# Altium PCB nanopiair_audiohat.PcbDoc
Units mm, origin at the board's own origin, x right, y up, seen from the top; angles counter-clockwise.
Board outline 40.01 x 40.01 mm, 4 copper layers (Top Layer, GND, POWER, Bottom Layer), stack 0.778 mm thick; 73 components, 57 nets, 277 pads, 226 vias.
Unrouted connection lines stored in the file: 1.
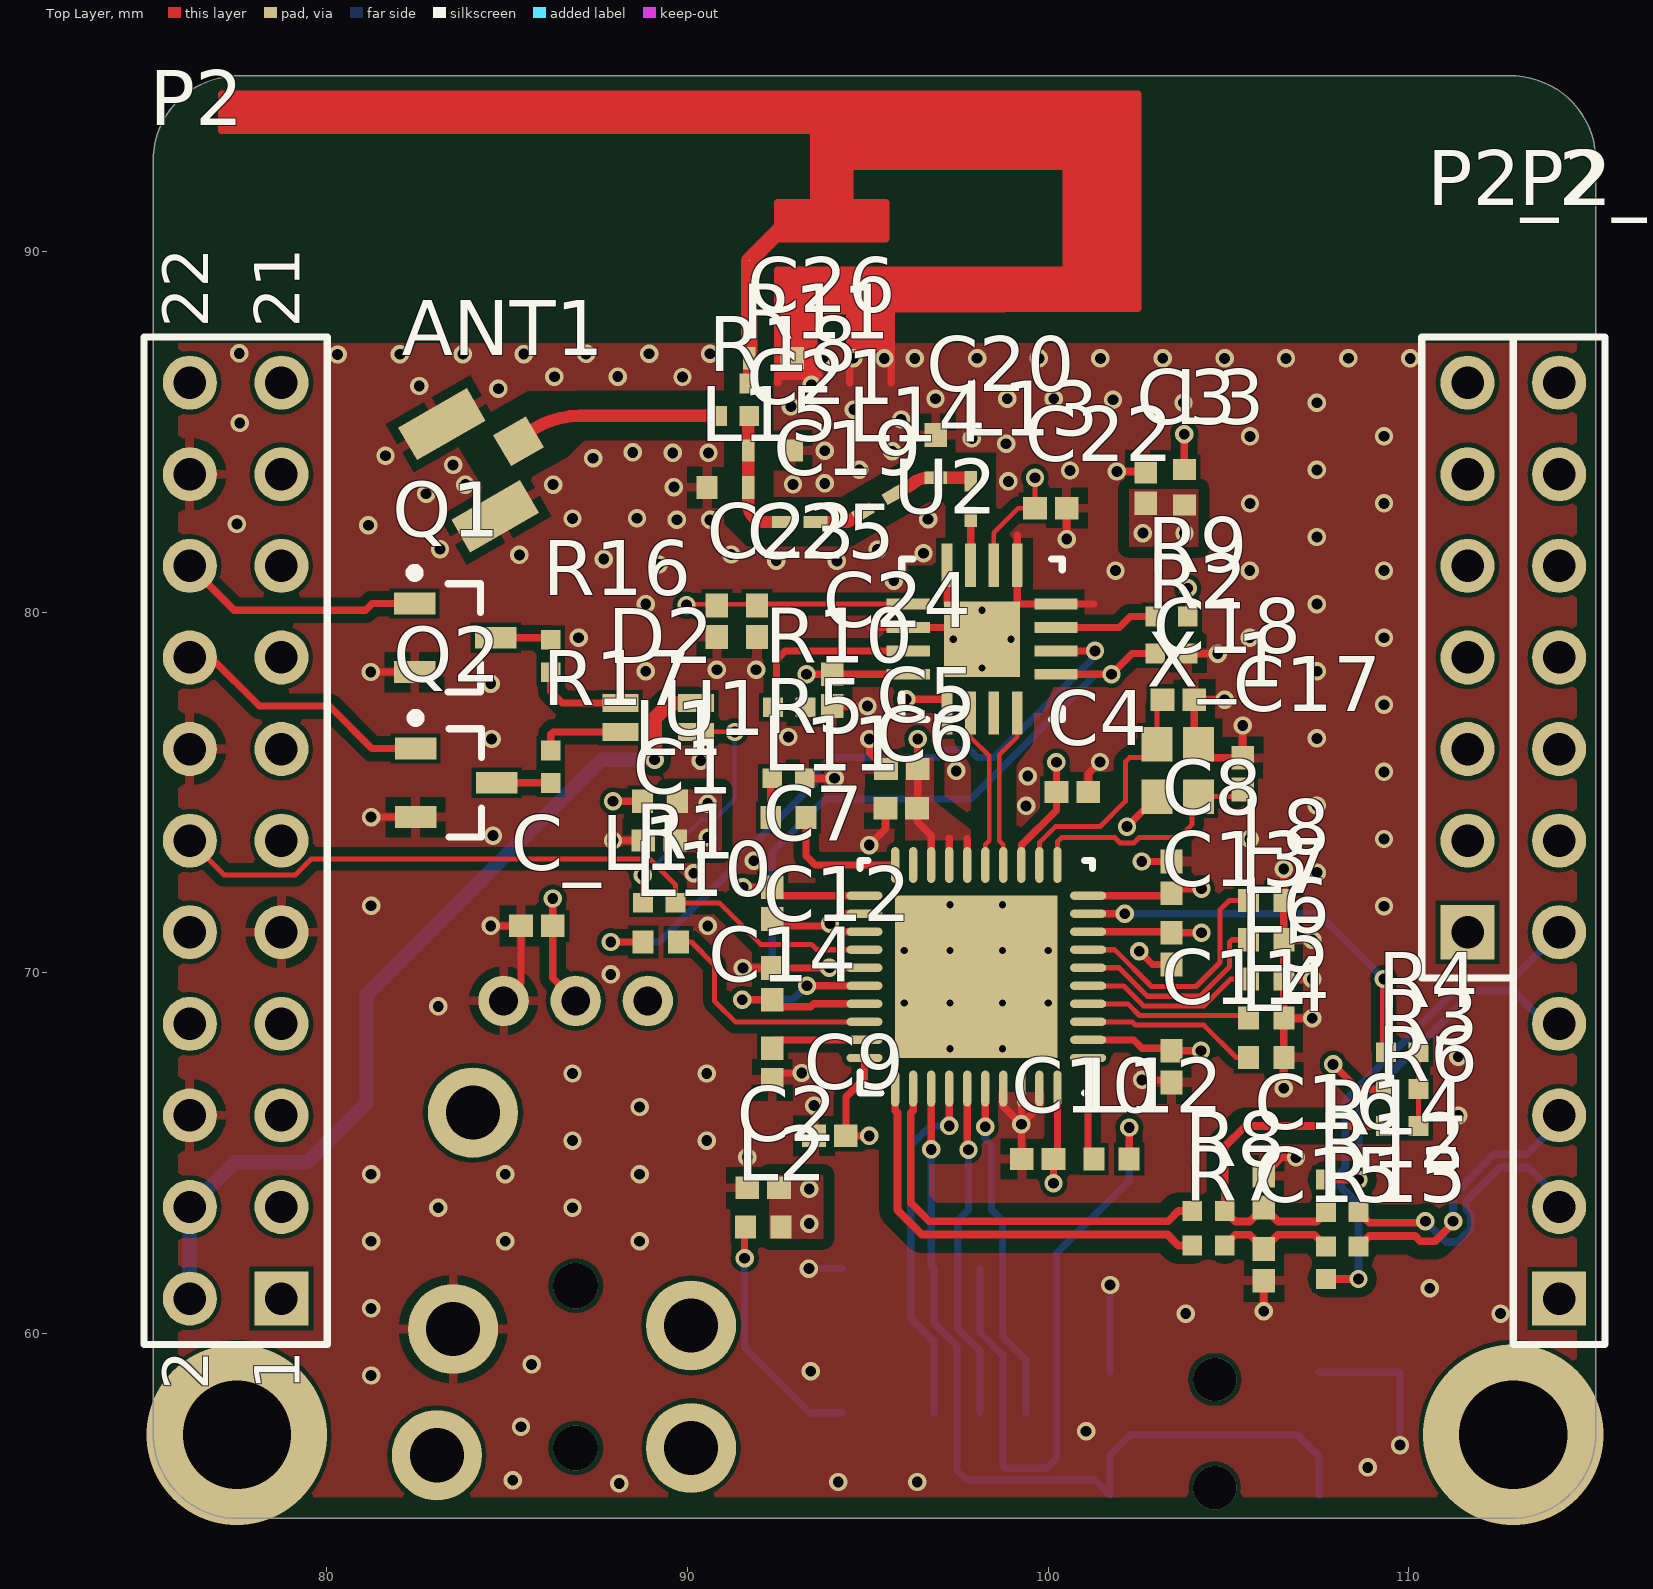
[diagram p0: Top Layer view]
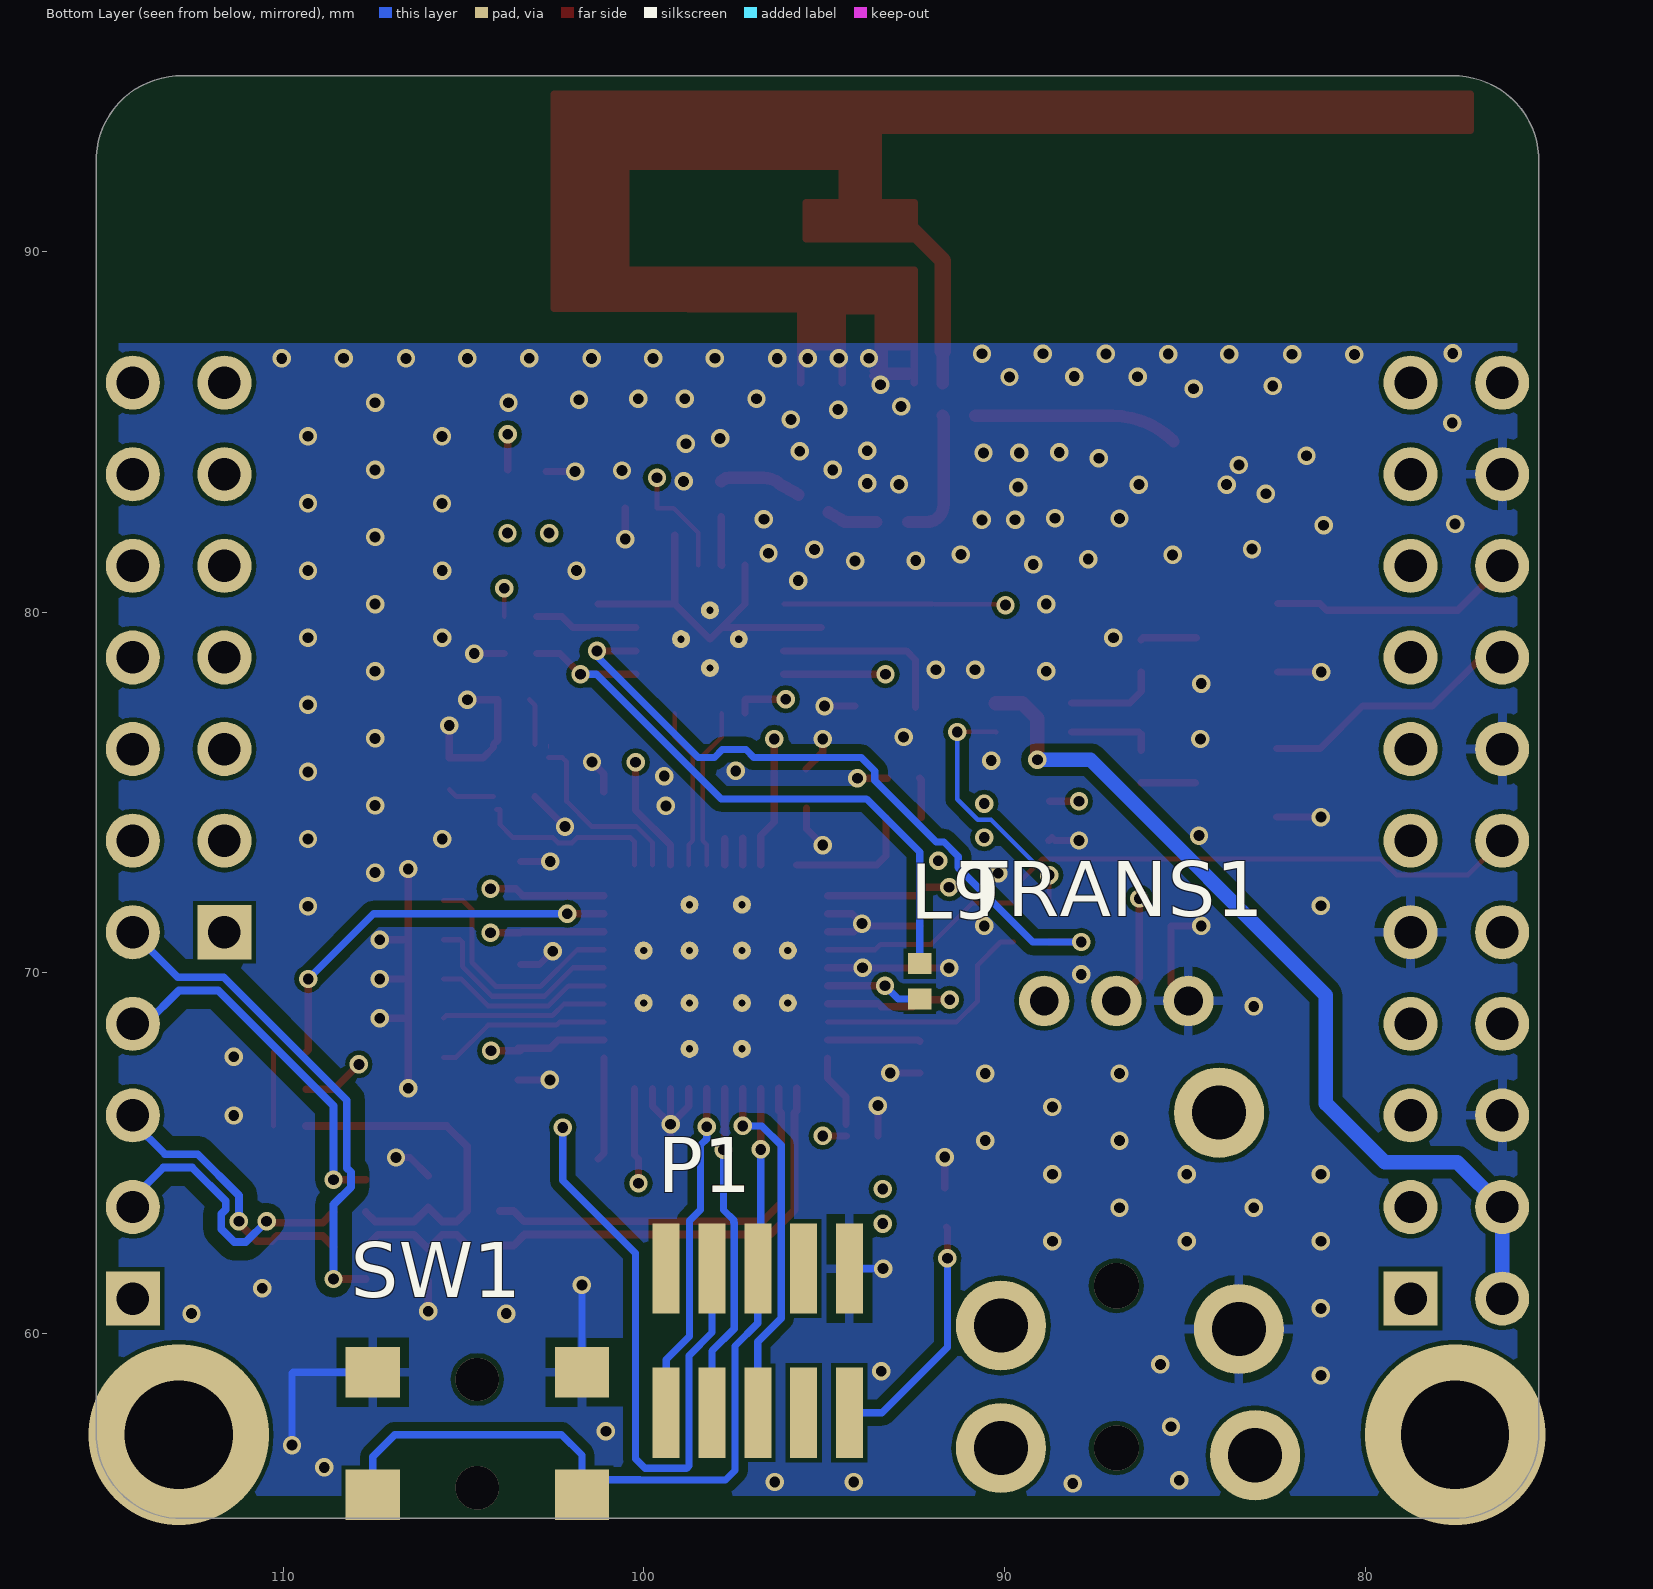
[diagram p1: Bottom Layer view, seen from below]
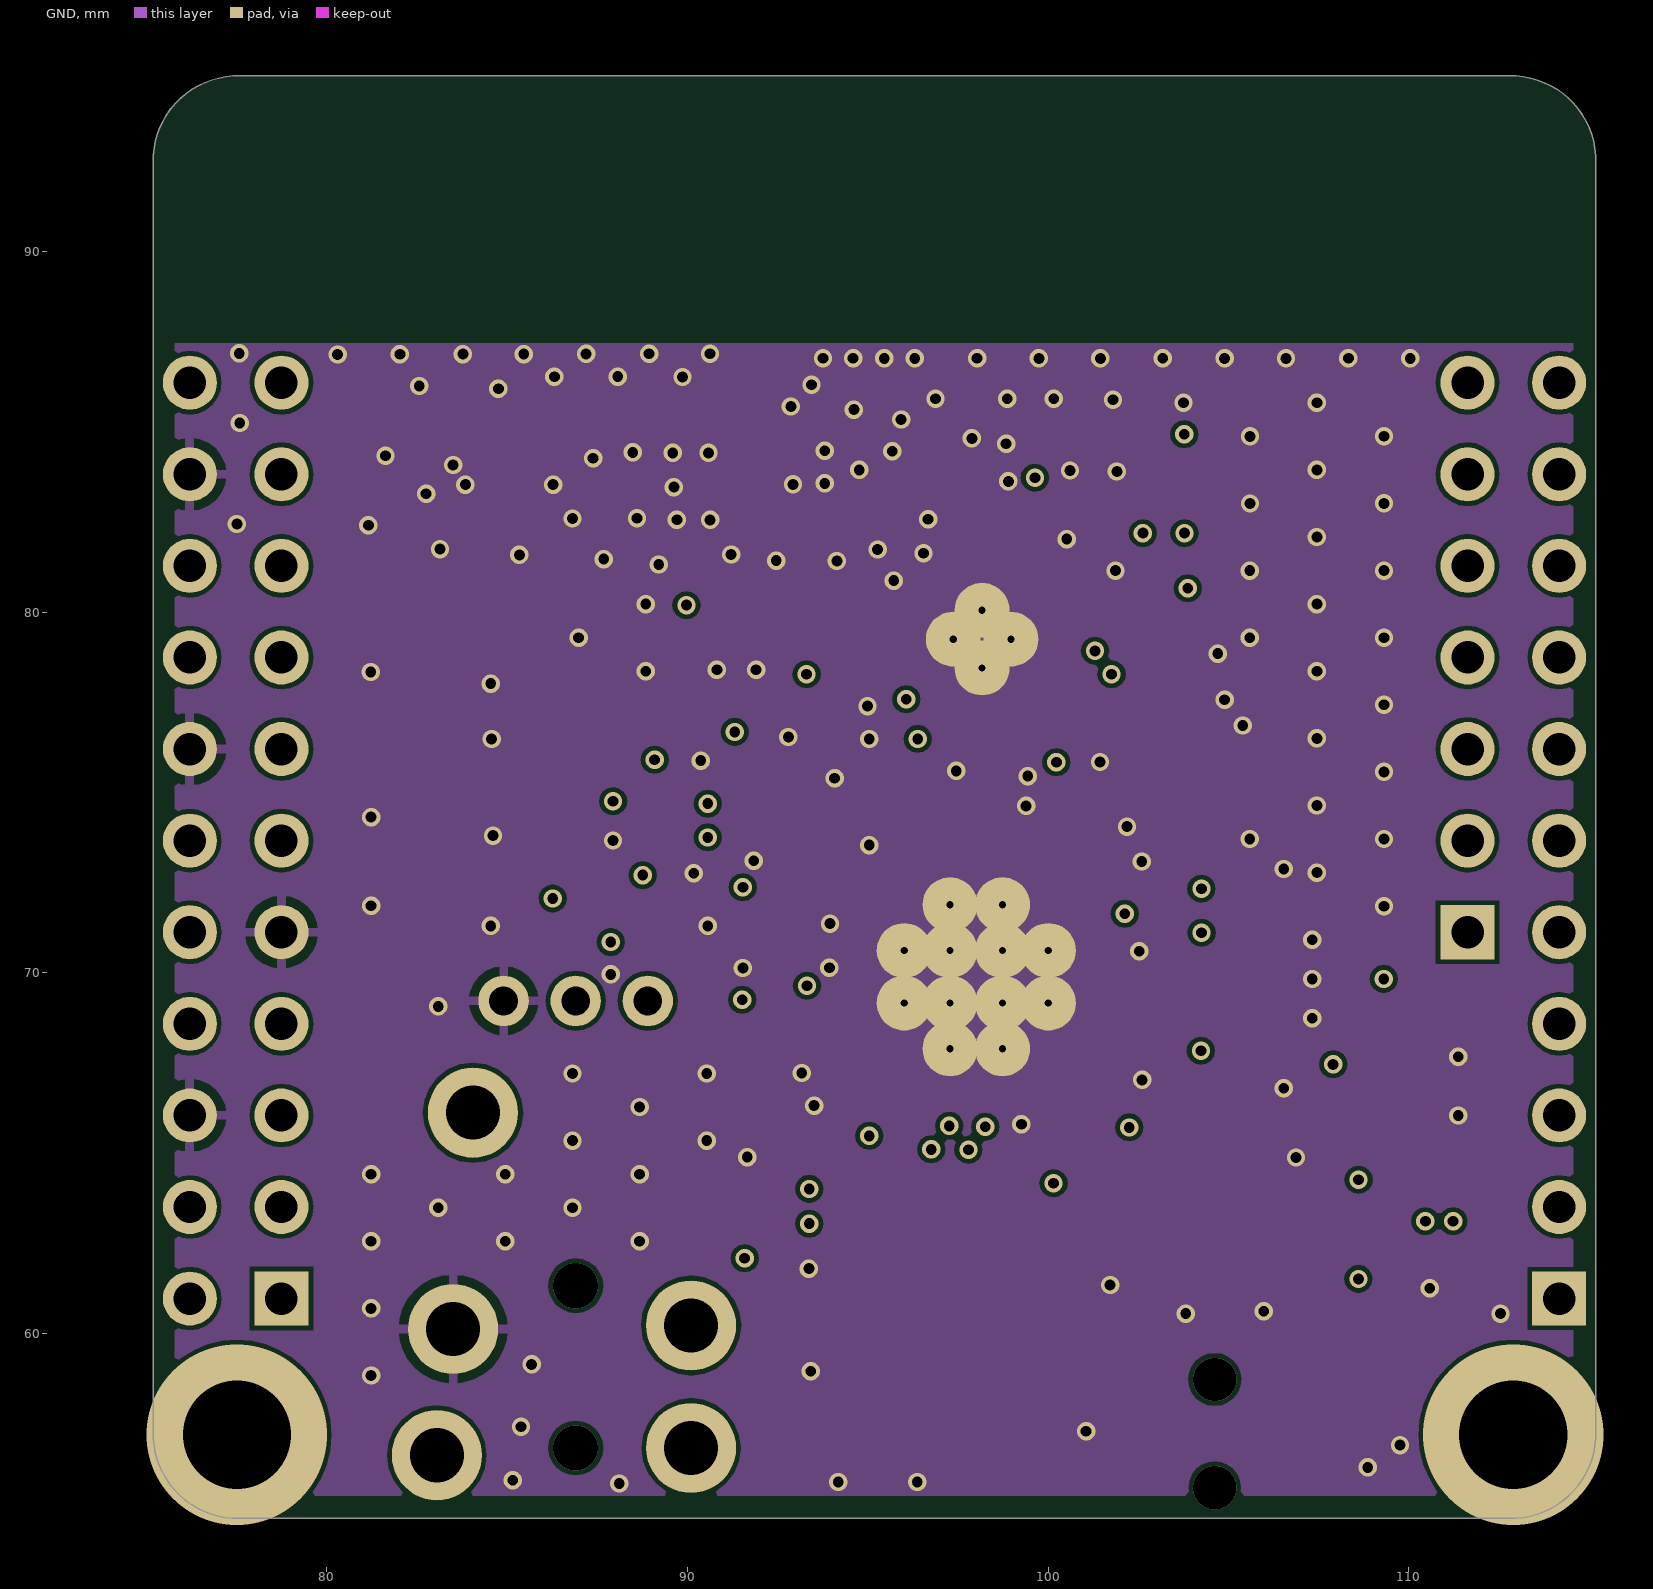
[diagram p2: GND]
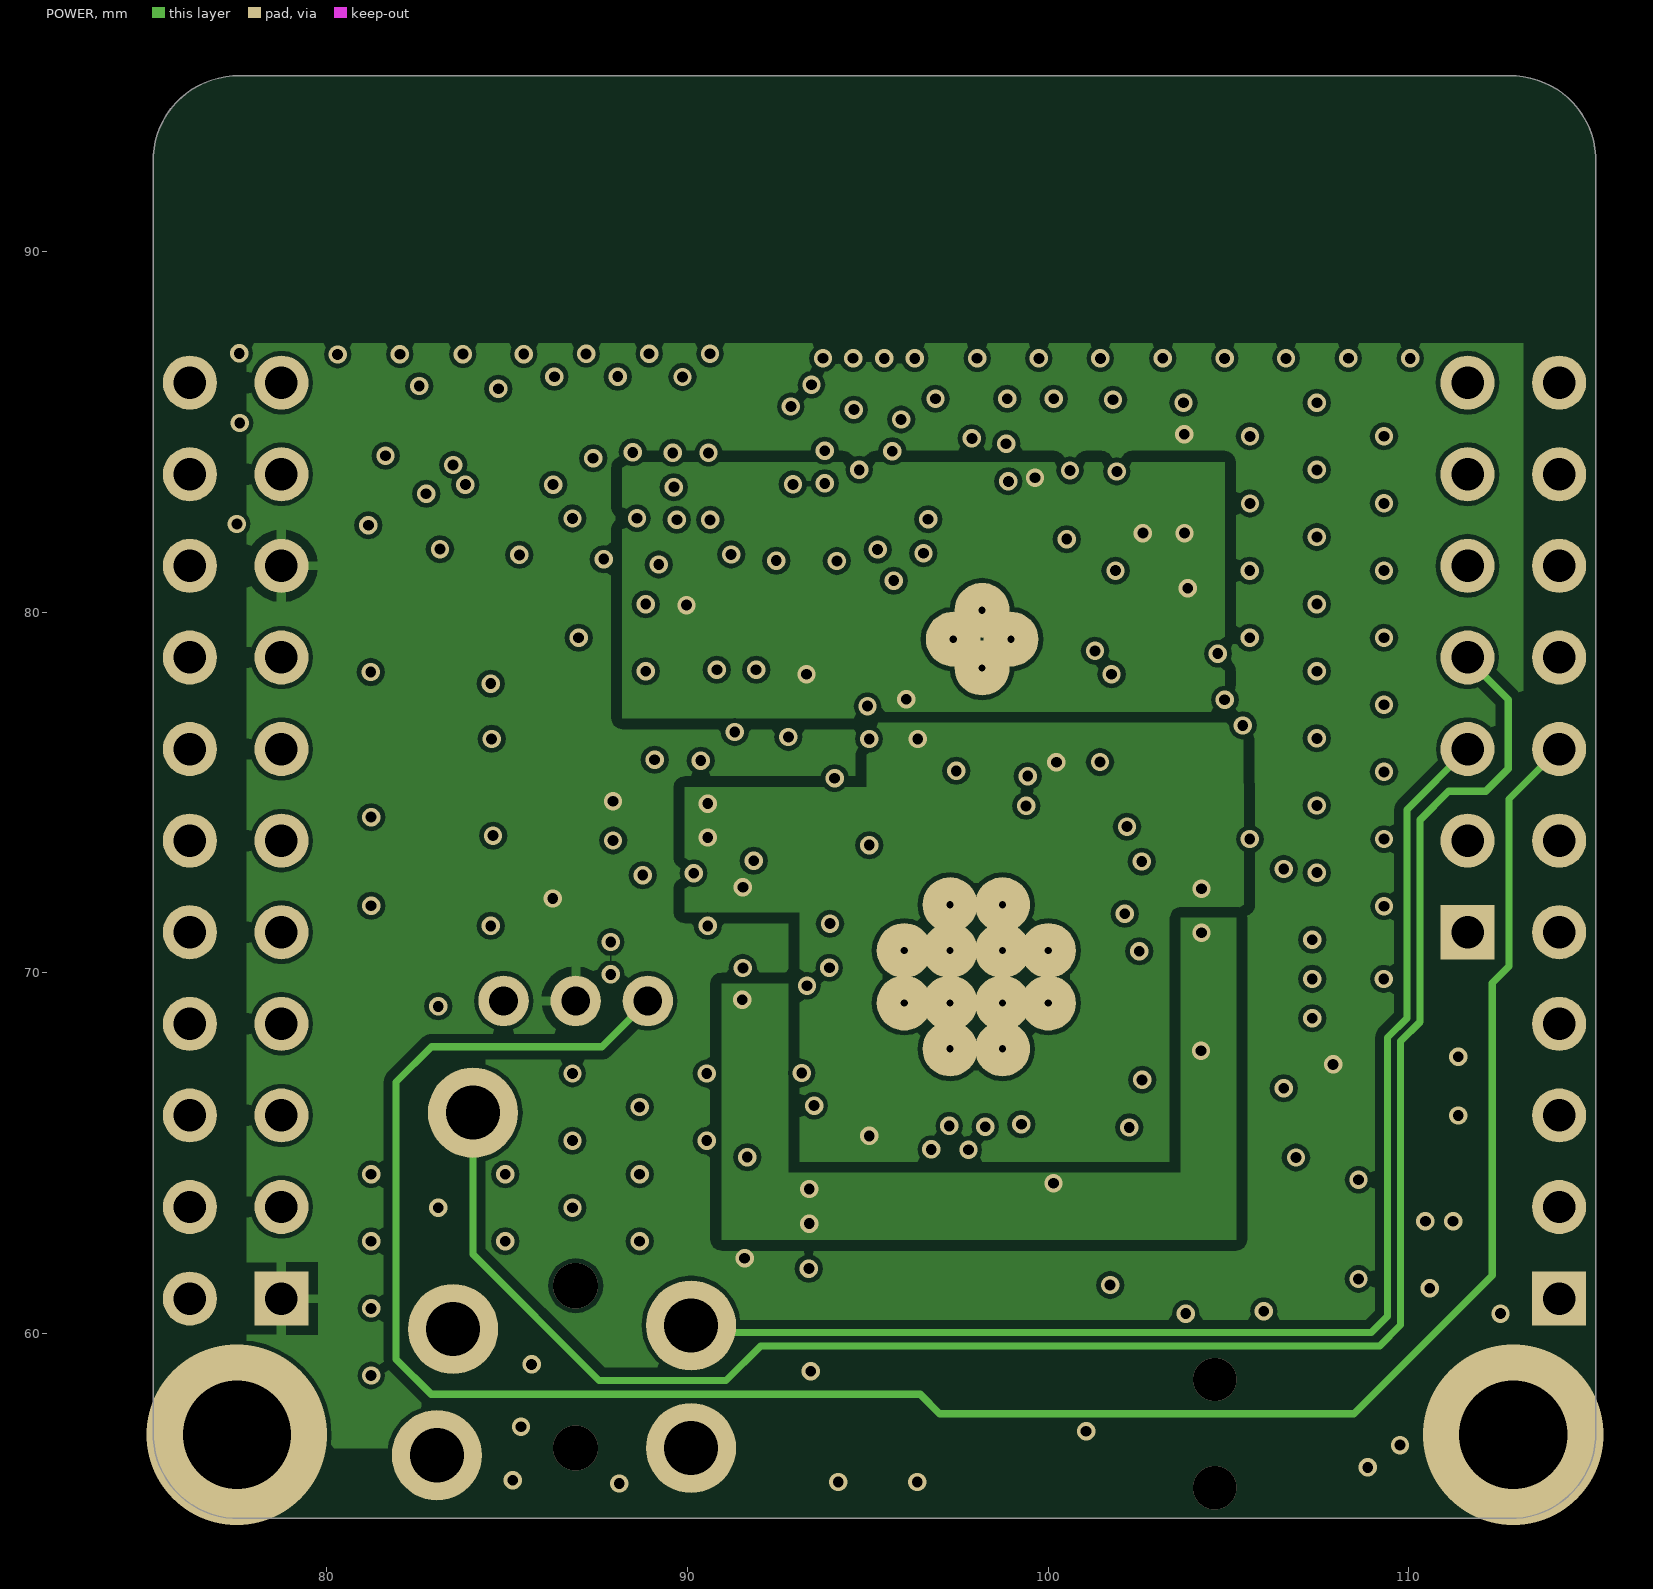
[diagram p3: POWER]
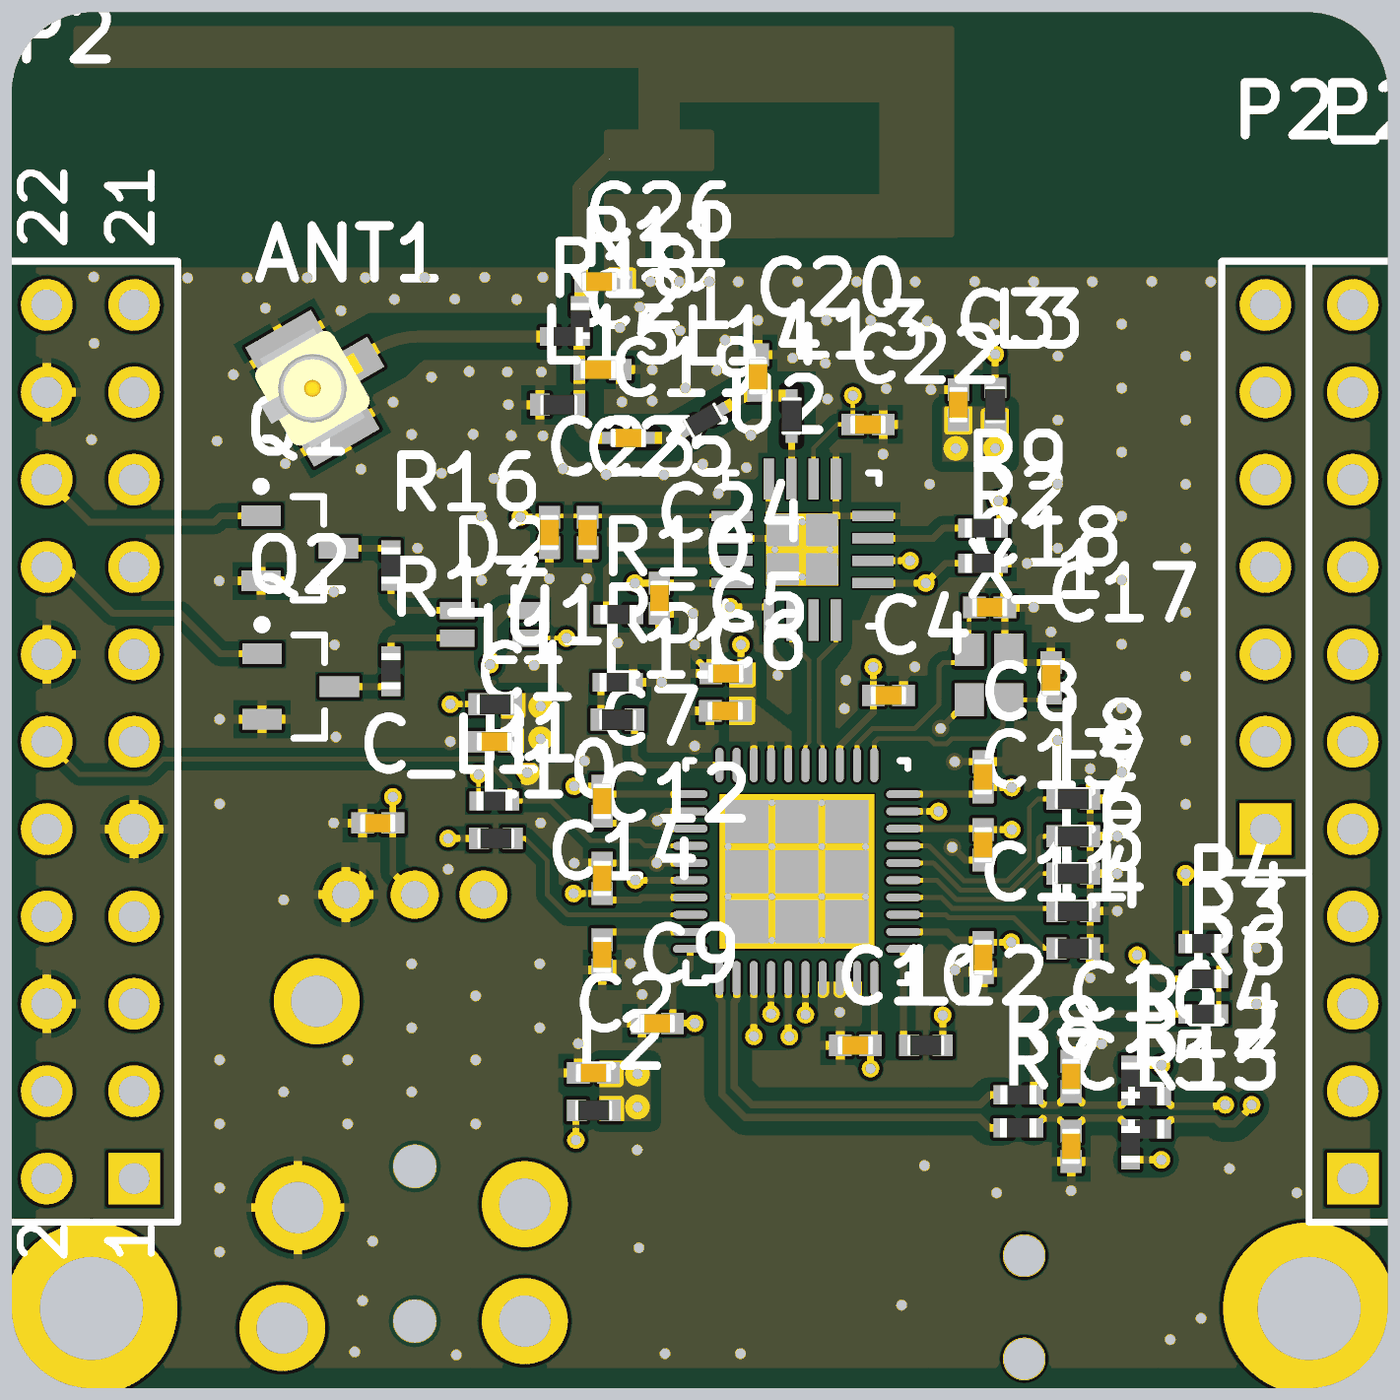
[diagram p4: 3D render of the assembled board from above, using the file's embedded part models]

## Layer stack, top to bottom
Top Solder: solder mask 0.0102, Solder Resist, Dk 3.5
Top Layer: signal copper 0.0356
Dielectric 1: core 0.254, FR-4, Dk 4.2
GND: signal copper 0.036
Dielectric 3: prepreg 0.127, Dk 4.2
POWER: signal copper 0.036
Dielectric 2: core 0.254, Dk 4.2
Bottom Layer: signal copper 0.0356
Bottom Solder: solder mask 0.0102, Solder Resist, Dk 3.5

## Board outline
75.184,57.277 ccw(c77.534,57.213) 77.594,54.864 112.776,54.864 ccw(c112.84,57.213) 115.189,57.274 115.189,92.456 ccw(c112.84,92.519) 112.779,94.869 77.597,94.869 ccw(c77.534,92.519) 75.184,92.459

## Design rules (kind name [scope] priority, off if disabled: settings)
Clearance Clearance_1 [(InDifferentialPairClass('All Differential Pairs'))] p1: gap=0.127 ignorepadtopadclearanceinfootprint=FALSE except(0: Arc-Hole Track-Hole SMDPad-Hole THPad-Hole Via-Hole Fill-Hole Poly-Hole Region-Hole Text-Hole; 0.3: Poly-Poly; 0.4: Arc-Track Arc-Poly Track-Poly)
Clearance [All] p2: gap=0.127 ignorepadtopadclearanceinfootprint=FALSE except(0: Arc-Hole Track-Hole SMDPad-Hole THPad-Hole Via-Hole Fill-Hole Poly-Hole Region-Hole Text-Hole; 0.254: Track-Poly; 0.3: Poly-Poly)
DiffPairsRouting [InDifferentialPair('RF')] p1: maxlimit=0.254 minlimit=0.127 mostfreqgap=0.152 toplayer_minwidth=0.127 toplayer_maxwidth=0.381 toplayer_prefwidth=0.127 midlayer1_minwidth=0.127 midlayer1_maxwidth=0.381 midlayer1_prefwidth=0.127 midlayer2_minwidth=0.127 midlayer2_maxwidth=0.381 midlayer2_prefwidth=0.127 bottomlayer_minwidth=0.127 bottomlayer_maxwidth=0.381 bottomlayer_prefwidth=0.127 maxuncoupledlength=12.7
DiffPairsRouting USBDiff [All] p2: maxlimit=0.152 minlimit=0.152 mostfreqgap=0.152 toplayer_minwidth=0.216 toplayer_maxwidth=0.216 toplayer_prefwidth=0.216 midlayer1_minwidth=0.216 midlayer1_maxwidth=0.216 midlayer1_prefwidth=0.216 midlayer2_minwidth=0.216 midlayer2_maxwidth=0.216 midlayer2_prefwidth=0.216 bottomlayer_minwidth=0.216 bottomlayer_maxwidth=0.216 bottomlayer_prefwidth=0.216 maxuncoupledlength=12.7
MinimumSolderMaskSliver [All] p1 off: minsoldermaskwidth=0.254
PolygonConnect PolygonConnect_17 [All vs IsVia OR InComponent('U1') OR InComponent('U2')] p1: connectstyle=Direct reliefconductorwidth=0.254 reliefentries=2 polygonreliefangle="90 Angle" airgapwidth=0.254
PolygonConnect PolygonConnect_6 [All vs IsNamedPolygon('VDD')] p2: connectstyle=Direct reliefconductorwidth=0.254 reliefentries=4 polygonreliefangle="90 Angle" airgapwidth=0.254
PolygonConnect PolygonConnect_5 [All vs IsNamedPolygon('VDD_CC2590')] p3: connectstyle=Direct reliefconductorwidth=0.254 reliefentries=4 polygonreliefangle="90 Angle" airgapwidth=0.254
PolygonConnect [All] p4: connectstyle=Relief reliefconductorwidth=0.254 reliefentries=4 polygonreliefangle="90 Angle" airgapwidth=0.254
RoutingVias [All] p1: holewidth=0.3 width=0.51 viastyle="Through Hole" minholewidth=0.254 minwidth=0.457 maxholewidth=0.711 maxwidth=0.914
SilkToSilkClearance [All] p1 off: silktosilkclearance=0.254
SilkToSolderMaskClearance [IsPad] p1 off: minsilkscreentomaskgap=0.254 clearancetoexposedcopper=TRUE
SolderMaskExpansion [All] p1: expansion=0.102
Width [All] p1: maxlimit=5 minlimit=0.127 preferedwidth=0.2
26 further rules are at their usual default settings.

## Classes and differential pairs
differential pair USB3: +USB3_P -USB3_N
differential pair USB2: +USB2_P -USB2_N
differential pair USBPI: +USBPI_P -USBPI_N
differential pair USB: +USB_P -USB_N
differential pair RF: +RF_P -RF_N

## Components (designator, comment, footprint, x,y, rotation, side; value= is the part's Value field where it differs from the comment)
ANT1 "UFL ANT" UFL_ANT 84.833,83.766 r120 top
C1 "" C_0402 89.216,73.664 r0 top value=2.2uF
C2 "" C_0402 92.096,64.032 r0 top value=2.2uF
C3 "" C_0402 102.707,83.458 r270 top value=2.2uF
C4 "" C_0402 100.672,75.008 r180 top value=100nF
C5 "" C_0402 95.944,75.648 r0 top value=100nF
C6 "" C_0402 95.928,74.56 r0 top value=220pF
C7 "" C_0402 92.352,71.928 r90 top value=100nF
C8 "" C_0402 103.424,72.64 r270 top value=100nF
C9 "" C_0402 93.952,65.472 r0 top value=1uF
C10 "" C_0402 99.712,64.832 r180 top value=100nF
C11 "" C_0402 103.424,67.392 r90 top value=100nF
C12 "" C_0402 92.352,69.688 r270 top value=100nF
C13 "" C_0402 103.424,70.664 r90 top value=100nF
C14 "" C_0402 92.352,67.464 r90 top value=1uF
C15 "" C_0402 105.984,61.896 r90 top value=47pF
C16 "" C_0402 105.984,63.928 r270 top value=47pF
C17 "" C_0402 105.398,75.52 r270 top value=12pF
C18 "" C_0402 103.616,77.568 r180 top value=12pF
C19 "" C_0402_RF_IN 93.112,82.496 r0 top value=20pF
C20 "" C_0402_RF_IN_OUT 96.882,84.032 r270 top value=1.6pF
C21 "" C_0402_RF_IN_OUT 91.997,84.48 r180 top value=1.3pF
C22 "" C_0402 100.077,82.883 r180 top value=1nF
C23 "" C_0402 90.816,79.744 r90 top value=1nF
C24 "" C_0402 94.016,77.832 r90 top value=1nF
C25 "" C_0402 91.927,79.744 r90 top value=18pF
C26 "" C_0402_RF_IN_OUT 92.026,87.04 r180 top value=1.3pF
C_L1 "" C_0402 85.824,71.296 r0 top value=0.1uF
D2 "RGB" RGB 89.088,77.824 r180 top
L1 "Inductor" L_0402 89.238,74.752 r0 top value="EMI HF block"
L2 "Inductor" L_0402 92.103,62.944 r0 top value="EMI HF block"
L3 "Inductor" L_0402 103.779,83.458 r270 top value="EMI HF block"
L4 "Inductor" L_0402 106.048,67.648 r0 top value=6.8nF
L5 "Inductor" L_0402 106.048,68.736 r0 top value=6.8nF
L6 "Inductor" L_0402 106.048,69.824 r0 top value=6.8nF
L7 "Inductor" L_0402 106.048,70.912 r0 top value=6.8nF
L8 "Inductor" L_0402 106.048,72 r0 top value=6.8nF
L9 "Inductor" L_0402 92.352,69.76 r90 bottom value=6.8nF
L10 "Inductor" L_0402 89.258,70.848 r180 top value=6.8nF
L11 "Inductor" L_0402 92.8,74.304 r180 top value=6.8nF
L12 "Inductor" L_0402 101.76,64.832 r180 top value=6.8nF
L13 "Inductor" L_0402_RF_IN 97.857,83.136 r90 top value="2.2nH RF"
L14 "Inductor" L_0402_RF_IN 95.296,83.011 r30 top value="3.9nH RF"
L15 "Inductor" L_0402_RF_IN_OUT 91.2,83.456 r180 top value="1.5nH DNM"
P1 "debug" "2x5 1.27mm header" 96.842,59.792 r0 bottom
P2 "Header 11X2" HDR2X11 78.74,60.96 r90 top locked
P2_1 "Header 11" HDR1X11 114.173,60.96 r90 top locked
P2_2 "Header 7" HDR1X7 111.633,71.12 r90 top locked
Q1 "QNPN" SOT-23B_N 83.557,79.286 r0 top
Q2 "QNPN" SOT-23B_N 83.584,75.264 r0 top
R1 "Res1" R_0402 89.218,71.936 r180 top
R2 "Res1" R_0402 103.424,78.848 r180 top value=10k
R3 "Res1" R_0402 109.824,66.768 r180 top value=NM
R4 "Res1" R_0402 109.824,67.792 r0 top value=0
R5 "Res1" R_0402 92.802,75.392 r180 top value=56k
R6 "Res1" R_0402 109.824,65.744 r0 top value="10k (ev mindre)"
R7 "Res1" R_0402 104.448,62.432 r0 top value=33
R8 "Res1" R_0402 104.45,63.392 r0 top value=33
R9 "Res1" R_0402 103.424,79.872 r0 top value=4.3k
R10 "Res1" R_0402 92.822,77.361 r180 top value=4.3k
R11 "Res1" R_0402 91.715,85.89 r90 top value=33
R12 "Res1" R_0402 108.162,63.36 r180 top value=0
R13 "Res1" R_0402 108.162,62.4 r180 top value=0
R14 "Res1" R_0402 107.712,63.808 r270 top value=0
R15 "Res1" R_0402 107.712,61.954 r90 top value=0
R16 "Res1" R_0402 86.208,78.782 r90 top value=330
R17 "Res1" R_0402 86.208,75.712 r270 top value=330
R18 "Res1" R_0402 91.265,85.44 r0 top value=33
SW1 "edge switch" "edge swich" 104.621,57.216 r270 bottom
TRANS1 "newComboJack" "audio combojack" 86.825,58.94 r0 bottom locked
U1 "CC8531RHAR" RHA0040H 98.009,69.885 r90 top value=Value
U2 "CC2590RGVR" RGV0016A 98.17,79.248 r90 top value=Value
X_1 "X_48" "48Mhz 2x1.6mm SMD" 104.679,74.372 r90 top

## Footprints (in the part's own frame and the unit in brackets; to place one, negate y for a bottom-side part, rotate by r counter-clockwise, add the part's x,y. Pads: shape width x height; smd on the part's side, far side on the other; paste and mask are expansions set on the pad)
"2x5 1.27mm header" [mm]
  rect 0.75x2.5 smd: 1(-2.54,-2) 2(-2.54,2) 3(-1.27,-2) 4(-1.27,2) 5(0,-2) 6(0,2) 7(1.27,-2) 8(1.27,2) 9(2.54,-2) 10(2.54,2)
"48Mhz 2x1.6mm SMD" [mm]
  rect 0.95x0.85 smd: 1(0.508,0.508) 2(1.958,0.508) 3(1.958,1.658) 4(0.508,1.658)
  body extent 0.1,0.15 2.35,1.97, height 0.5
"audio combojack" [mm] "FCR684204T"
  round 2.5 hole 1.5: 1(3.275,2.125) 2(-2.775,-7.175) 3(3.275,-1.275) 4(-3.325,-1.175) 5(-3.775,2.325)
  round 1.4 hole 0.8: GND(-1.925,-10.275) SIG(2.075,-10.275) VCC(0.075,-10.275)
  body extent -4.85,-11.88 4.45,6.15, height 4.7
C_0402 [mm] "Chip Capacitor, 2-Leads, Body 1,00x0,50mm, IPC Medium Density"
  rect 0.66x0.62 smd: 1(-0.44,0) 2(0.44,0)
  body extent -0.53,-0.28 0.53,0.28, height 0.55
C_0402_RF_IN [mm] "Chip Capacitor, 2-Leads, Body 1,00x0,50mm, IPC Medium Density"
  rect 0.66x0.343 smd mask+0.202: 1(-0.44,0) 2(0.44,0)
  body extent -0.53,-0.28 0.53,0.28, height 0.55
C_0402_RF_IN_OUT [mm] "Chip Capacitor, 2-Leads, Body 1,00x0,50mm, IPC Medium Density"
  rect 0.343x0.62 smd: 1(0.31,0)
  rect 0.66x0.62 smd: 2(-0.88,0)
  body extent -0.76,-0.27 0.29,0.28, height 0.55
"edge swich" [mm]
  rect 1.4x1.5 smd: A(-1.7,-2.9) A(-1.7,2.9) B(1.7,-2.9) B(1.7,2.9)
  body extent -3.03,-2.02 4.37,1.96, height 1.5
HDR1X7 [mm] "Connector; Header; 7 Position"
  rect 1.5x1.5 hole 0.9: 1(0,0)
  round 1.5 hole 0.9: 2(2.54,0) 3(5.08,0) 4(7.62,0) 5(10.16,0) 6(12.7,0) 7(15.24,0)
  silkscreen extent -1.27,-1.27 16.51,1.27
HDR1X11 [mm] "Connector; Header; 11 Position"
  rect 1.5x1.5 hole 0.9: 1(0,0)
  round 1.5 hole 0.9: 2(2.54,0) 3(5.08,0) 4(7.62,0) 5(10.16,0) 6(12.7,0) 7(15.24,0) 8(17.78,0) 9(20.32,0) 10(22.86,0) 11(25.4,0)
  silkscreen extent -1.27,-1.27 26.67,1.27
HDR2X11 [mm] "Connector; Header; 11x2 Position"
  rect 1.5x1.5 hole 0.9: 1(0,0)
  round 1.5 hole 0.9: 2(0,2.54) 3(2.54,0) 4(2.54,2.54) 5(5.08,0) 6(5.08,2.54) 7(7.62,0) 8(7.62,2.54) 9(10.16,0) 10(10.16,2.54) 11(12.7,0) 12(12.7,2.54) 13(15.24,0) 14(15.24,2.54) 15(17.78,0) 16(17.78,2.54) 17(20.32,0) 18(20.32,2.54) 19(22.86,0) 20(22.86,2.54) 21(25.4,0) 22(25.4,2.54)
  silkscreen extent -1.27,-1.27 26.67,3.81
L_0402 [mm] "Inductor 0402"
  rect 0.58x0.64 smd: 1(-0.49,0) 2(0.49,0)
  body extent -0.55,-0.3 0.55,0.3, height 0.6
L_0402_RF_IN [mm] "Inductor 0402"
  rect 0.58x0.343 smd mask+0.202: 1(-0.49,0) 2(0.49,0)
  body extent -0.55,-0.3 0.55,0.3, height 0.6
L_0402_RF_IN_OUT [mm] "Inductor 0402"
  rect 0.343x0.64 smd: 1(-0.49,0)
  rect 0.58x0.64 smd: 2(0.66,0)
  body extent -0.44,-0.3 0.66,0.3, height 0.6
R_0402 [mm] "Chip Resistor, 2-Leads, Body 1,00x0,50mm, IPC Medium Density"
  rect 0.55x0.55 smd: 1(-0.45,0) 2(0.45,0)
  body extent -0.53,-0.28 0.53,0.28, height 0.4
RGB [mm]
  rect 1x0.5 smd: 1(-1.15,1.15) 2(0.95,1.15) 3(-1.15,0.35) 4(0.95,0.35)
RGV0016A [mm]
  rect 1.2x0.3 smd paste+0 mask+0.051: 1(-2.05,0.975) 2(-2.05,0.325) 3(-2.05,-0.325) 4(-2.05,-0.975) 9(2.05,-0.975) 10(2.05,-0.325) 11(2.05,0.325) 12(2.05,0.975)
  rect 0.3x1.2 smd paste+0 mask+0.051: 5(-0.975,-2.05) 6(-0.325,-2.05) 7(0.325,-2.05) 8(0.975,-2.05) 13(0.975,2.05) 14(0.325,2.05) 15(-0.325,2.05) 16(-0.975,2.05)
  rect 2.1x2.1 smd paste-1.037 mask+0.051: 17(0,0)
  round 0.5 / inner round 1.524 / far side round 0.5 hole 0.203 mask+0.051: V(-0.8,0) V(0,0.8) V(0,-0.8) V(0.8,0)
  silkscreen extent -2.22,-2.22 2.22,2.22, body extent -2.12,-2.12 2.12,2.12, height 1
RHA0040H [mm]
  oval 1x0.23 smd paste+0 mask+0.076: 1(-3.1,2.25) 2(-3.1,1.75) 3(-3.1,1.25) 4(-3.1,0.75) 5(-3.1,0.25) 6(-3.1,-0.25) 7(-3.1,-0.75) 8(-3.1,-1.25) 9(-3.1,-1.75) 10(-3.1,-2.25) 21(3.1,-2.25) 22(3.1,-1.75) 23(3.1,-1.25) 24(3.1,-0.75) 25(3.1,-0.25) 26(3.1,0.25) 27(3.1,0.75) 28(3.1,1.25) 29(3.1,1.75) 30(3.1,2.25)
  oval 0.23x1 smd paste+0 mask+0.076: 11(-2.25,-3.1) 12(-1.75,-3.1) 13(-1.25,-3.1) 14(-0.75,-3.1) 15(-0.25,-3.1) 16(0.25,-3.1) 17(0.75,-3.1) 18(1.25,-3.1) 19(1.75,-3.1) 20(2.25,-3.1) 31(2.25,3.1) 32(1.75,3.1) 33(1.25,3.1) 34(0.75,3.1) 35(0.25,3.1) 36(-0.25,3.1) 37(-0.75,3.1) 38(-1.25,3.1) 39(-1.75,3.1) 40(-2.25,3.1)
  rect 4.5x4.5 smd paste-2.237 mask+0.051: 41(0,0)
  round 0.5 / inner round 1.524 / far side round 0.5 hole 0.203 mask+0.051: V(-2,-0.727) V(-2,0.727) V(-0.727,2) V(-0.727,-0.727) V(-0.727,0.727) V(-0.727,-2) V(0.727,2) V(0.727,-0.727) V(0.727,0.727) V(0.727,-2) V(2,-0.727) V(2,0.727)
  silkscreen extent -3.22,-3.22 3.22,3.22, body extent -3.13,-3.13 3.13,3.13, height 1
SOT-23B_N [mm] "SOT23, 3-Leads, Body 2.9x1.3mm, Pitch 0.95mm, Lead Span 2.4mm, IPC Medium Density"
  rect 1.15x0.6 smd: 1(-1.125,0.95) 2(-1.125,-0.95) 3(1.125,0)
  silkscreen extent -1.25,-1.5 0.7,1.92, body extent -0.7,-1.5 0.7,1.5, height 1.14
UFL_ANT [mm]
  rect 1.05x2.2 smd: 1(-0.875,0.7) 2(2.075,0.7)
  rect 1x1.05 smd: 3(0.6,-0.9)
  body extent -0.9,-0.85 2.1,2.25, height 1.25

## Part data
C1 C2 C3 C4 C5 C6 C7 C8 C9 C10 C11 C12 C13 C14 C15 C16 C17 C18 C19 C20 C21 C22 C23 C24 C25 C26 C_L1: library part Cap
P2: "Header, 11-Pin, Dual row", LatestRevisionDate=17-Jul-2002, LatestRevisionNote="Re-released for DXP Platform.", Publisher="Altium Limited"
P2_1: "Header, 11-Pin", LatestRevisionDate=17-Jul-2002, LatestRevisionNote="Re-released for DXP Platform.", Publisher="Altium Limited"
P2_2: "Header, 7-Pin", LatestRevisionDate=17-Jul-2002, LatestRevisionNote="Re-released for DXP Platform.", Publisher="Altium Limited"
Q1 Q2: "NPN Bipolar Transistor", LatestRevisionDate=29-May-2009, LatestRevisionNote="IPC-7351 Footprint Added.", PackageDescription="3-Pin SOT-23 Package 0.95 mm Pitch, 2.4 mm Lead Span", PackageReference=SOT-23B, PackageVersion=Aug-1999, Published=8-Jun-2000, Publisher="Altium Limited"
R1 R2 R3 R4 R5 R6 R7 R8 R9 R10 R11 R12 R13 R14 R15 R16 R17 R18: "Resistor"
  R1: =330
U1 U2: "Imported", Manufacturer="Texas Instruments", RefDes=RefDes, TYPE=TYPE
  U1: PartNumber=CC8531RHAR
  U2: PartNumber=CC2590RGVR

## Free pads (board coordinates)
  round 0.025 smd: 1(91.715,87.227)
  round 0.025 smd mask+0.102: 1(91.715,89.748) 1(91.715,89.748) 1(92.569,90.602)

## Via types
v1: diameter 0.51, hole 0.3, Top Layer to Bottom Layer, tented both sides, 173 vias
v2: diameter 0.51, hole 0.3, Top Layer to Bottom Layer, 44 vias
v3: diameter 1.2, hole 1.2, Top Layer to Bottom Layer, 3 vias
v4: diameter 0.51, hole 0.3, Top Layer to Bottom Layer, tented top, 2 vias
v5: diameter 1.25, hole 1.25, Top Layer to Bottom Layer, tented both sides, 2 vias
v6: diameter 5, hole 3, Top Layer to Bottom Layer, 2 vias

## Nets (pads, with @x,y where several pads share a name; then routed paths per layer and width w, separated by ;. In a path a pad name is that pad's centre, name@x,y a point inside that pad or via, vN(x,y) a via of type N, cw(c..) or ccw(c..) an arc to the next point about the centre after c; other vN are vias at no path point)
3V3: C_L1.2 L1.1 L2.1 L3.1 P1.2 P2.1 P2.17 R3.2 TRANS1.VCC | length 13.5
  Top Layer w0.2: v2(86.264,72.056) C_L1.2 86.264,69.851 TRANS1.VCC ; v2(87.936,74.752) L1.1 ; v2(91.584,62.08) 91.584,62.916 L2.1 ; L3.1 v2(103.779,84.928) ; v2(107.904,67.456) 108.592,66.768 R3.2
  Bottom Layer w0.2: v2(91.584,62.08) 91.584,59.608 93.4,57.792 P1.2
5V: D2.3 P2.2 P2.4 | length 24.8
  Top Layer w0.4: v2(89.088,75.904) 89.088,77.056 89.506,77.474 D2.3
  Bottom Layer w0.4: P2.2 P2.4 77.44,64.74 79.46,64.74 81.024,66.304 81.088,66.368 81.088,69.376 87.616,75.904 v2(89.088,75.904)
GND: ANT1.1 ANT1.2 C1.1 C2.1 C3.1 C4.1 C5.1 C6.1 C7.1 C8.1 C9.1 C10.2 C11.1 C12.1 C13.1 C14.1 C15.1 C16.1 C17.1 C18.1 C20.2 C21.2 C22.1 C23.1 C24.1 C25.1 C26.2 C_L1.1 L4.2 L5.2 L6.2 L7.2 L8.2 L15.2 P1.1 P2.6 P2.9 P2.14 P2.20 Q1.2 Q2.2 R2.1 R5.1 R10.1 SW1.A TRANS1.4 TRANS1.GND U1.7 U1.8 U1.9 U1.32 U1.33 U1.35 U1.41 U1.V U2.8 U2.9 U2.12 U2.14 U2.17 U2.V X_1.2 X_1.4 | length 83.5
  Top Layer w0.2: v1(81.216,78.336) Q1.2 ; v1(81.226,74.314) Q2.2 ; v1(84.544,71.296) C_L1.1 85.384,69.699 TRANS1.GND ; v1(87.936,73.664) 88.599,73.664 88.683,73.749 88.772,73.66 C1.1 ; v1(91.536,70.128) C12.1 93.928,70.128 v1(93.935,70.135) U1.35 ; C2.1 v1(91.656,64.884) ; C14.1@92.352,67.216 v1(93.168,67.216) ; C7.1@92.352,71.296 93.888,71.296 v1(93.952,71.36) ; R5.1 v1(94.08,75.392) ; C9.1 v1(93.512,66.312) ; C24.1@94.144,77.392 v1(94.992,77.392) ; U1.33 94.177,71.135 v1(93.952,71.36) ; U1.32 94.226,71.634 v1(93.952,71.36) ; v1(95.04,73.536) 95.488,73.984 C6.1 ; v1(95.04,76.48) 95.04,76.112 C5.1 ; 95.072,79.573 U2.14 U2.17@97.845,79.573 ; U2.12 97.195,80.223 U2.17@97.845,79.573 ; U1.7 98.759,66.297 v1(99.259,65.797) ; 99.145,82.137 U2.9 U2.17@99.145,80.223 ; U1.8 v1(99.259,65.797) ; C10.2 99.259,64.844 v1(99.259,65.797) ; U1.9 99.759,66.296 v1(99.259,65.797) ; v1(100.517,82.021) C22.1 ; C4.1 101.112,75.512 v1(101.44,75.84) ; 101.27,80.223 U2.8 U2.17@99.145,80.223 ; v1(101.908,83.898) C3.1 ; v1(102.189,74.048) X_1.4 ; v1(102.528,70.592) 102.896,70.224 C13.1 ; v1(102.6,73.08) C8.1 ; v1(102.608,67.024) C11.1@103.488,67.024 ; R2.1 v1(104.704,78.848) ; v1(104.896,77.568) C18.1 104.056,76.445 X_1.2 104.171,76.245 104.456,75.96 C17.1 v1(105.398,76.854) ; v1(105.984,60.608) C15.1 ; C16.1 106.488,64.872 v1(106.875,64.872) ; v1(106.538,66.794) L4.2 L5.2 ; v1(106.538,72.874) L8.2 L7.2 ; v1(107.328,68.736) L5.2 ; v1(107.328,69.824) L6.2 ; v1(107.328,70.912) L7.2 ; U2.17@97.845,79.573 U2.17 U2.17@99.145,80.223 ; L5.2 L6.2 ; L6.2 L7.2
  Top Layer w0.203: 92.502,86.354 92.502,89.488 ; 92.502,87.354 93.502,87.354 ; 92.502,87.456 93.502,87.456 ; 92.502,87.659 93.502,87.659 ; 92.641,86.682 93.641,86.682 ; 92.65,86.542 93.65,86.542 ; v1@93.336,86.41 93.336,87.41 ; v1@93.502,86.354 93.502,88.354 ; 94.502,86.354 94.502,88.354 ; 94.502,87.354 95.652,87.354 ; 94.502,87.456 95.652,87.456 ; 94.502,87.659 95.652,87.659 ; 95.652,86.354 95.652,88.395
  Bottom Layer w0.2: v1(93.368,61.792) P1.1 ; SW1.A@101.721,58.916 v1(101.721,61.337) ; SW1.A@107.521,58.916 109.732,58.916 109.76,58.888 v1(109.76,56.896)
  other v1: 88.109,55.833 94.179,55.872 96.371,55.872 85.155,55.921 101.056,57.28 85.382,57.408 81.226,58.826 93.418,58.944 85.677,59.136 103.818,60.544 112.547,60.544 81.226,60.688 81.226,62.549 84.949,62.549 88.671,62.549 83.087,63.48 86.81,63.48 81.226,64.41 84.949,64.41 88.671,64.41 86.81,65.341 90.533,65.341 111.375,66.037 88.671,66.272 86.81,67.202 90.533,67.202 111.375,67.667 83.087,69.064 87.872,69.952 90.56,71.295 109.316,71.843 81.226,71.856 107.455,72.773 91.84,73.1 105.594,73.704 109.316,73.704 84.608,73.801 99.392,74.624 107.455,74.635 99.437,75.451 109.316,75.565 97.454,75.595 90.368,75.881 84.569,76.48 107.455,76.496 92.8,76.534 109.316,77.427 84.544,78.016 88.842,78.357 107.455,78.357 90.816,78.4 91.904,78.4 86.98,79.288 105.594,79.288 109.316,79.288 88.842,80.219 107.455,80.219 95.721,80.872 101.871,81.149 105.594,81.149 109.316,81.149 89.202,81.318 94.145,81.415 92.463,81.425 87.68,81.467 85.338,81.584 91.209,81.597 96.544,81.632 83.136,81.746 95.273,81.733 107.455,82.08 81.152,82.405 77.503,82.442 89.707,82.559 90.628,82.554 96.673,82.571 86.81,82.595 88.599,82.6 105.6,83.011 109.316,83.013 82.752,83.281 89.623,83.463 83.84,83.533 86.273,83.533 92.925,83.54 93.806,83.568 98.9,83.623 100.608,83.924 94.765,83.942 107.455,83.941 83.5,84.078 87.384,84.262 81.627,84.334 89.591,84.413 90.583,84.413 88.482,84.426 95.68,84.457 93.806,84.471 98.837,84.667 97.887,84.816 105.6,84.872 109.316,84.875 77.582,85.243 95.923,85.34 94.616,85.615 92.867,85.699 103.755,85.803 107.455,85.803 101.801,85.888 96.878,85.913 98.87,85.913 100.157,85.913 84.757,86.192 82.559,86.267 93.44,86.302 86.308,86.523 89.862,86.519 88.066,86.528 93.757,87.04 94.592,87.04 95.459,87.035 96.303,87.035 98.033,87.04 99.747,87.035 101.451,87.035 103.182,87.04 104.895,87.035 106.6,87.035 108.33,87.04 110.043,87.035 80.297,87.143 82.025,87.148 83.772,87.153 85.461,87.153 87.189,87.158 77.568,87.172 88.936,87.163 90.625,87.163
  other v2: 90.173,72.757
  other v4: 108.864,56.279 110.587,61.248
IOVDD: C2.2 C10.1 C11.2 C12.2 C13.2 L2.2 U1.10 U1.12 U1.18 U1.37 | length 12.6
  Top Layer w0.2: v2(91.52,69.248) C12.2 92.544,69.056 93.418,69.056 93.496,69.134 U1.37 ; v2(100.152,64.159) C10.1 100.259,64.939 U1.10 ; U1.12 102.377,68.134 102.608,67.904 C11.2@103.488,67.904 ; U1.18 103.393,71.135 C13.2 v2(104.256,71.104) ; C11.2 v2(104.24,67.832)
  other v2: 93.376,63.04 93.376,64
NetANT1_3: ANT1.3 R18.1 | length 5.7
  Top Layer w0.343: ANT1.3 cw(c87.012,83.036) 87.012,85.44 R18.1
NetC14_2: C14.2 U1.39 | length 2.6
  Top Layer w0.2: C14.2@92.352,68.096 92.39,68.134 U1.39
NetC19_1: C19.1 C21.1 L15.1 R11.1 R18.2 | length 3.7
  Top Layer w0.343: R11.1 ccw(c91.783,85.371) 91.686,85.371 C21.1 91.69,84.477 L15.1 91.69,82.986 ccw(c92.202,82.986) 91.84,82.624 ccw(c92.149,82.933) 92.149,82.496 C19.1
NetC19_2: C19.2 L14.1 | length 1.4
  Top Layer w0.343: C19.2 94.373,82.496 ccw(c94.373,82.715) 94.528,82.56 L14.1
NetC20_1: C20.1 L13.2 L14.2 | length 2.3
  Top Layer w0.343: L14.2 96.192,83.522 cw(c96.674,83.04) 96.674,83.722 C20.1 97.625,83.722 cw(c97.625,83.394) L13.2
NetC26_1: C26.1 R11.2 | length 348.7
  Top Layer w0.203: 77.085,93.552 102.485,93.552 ; 77.085,93.755 102.485,93.755 ; 77.085,93.958 102.485,93.958 ; 77.085,94.161 102.485,94.161 ; 92.502,87.862 93.502,87.862 ; 92.502,88.065 93.502,88.065 ; 92.502,88.268 93.502,88.268 ; 92.502,88.472 102.485,88.472 ; 92.502,88.675 102.485,88.675 ; 92.502,88.878 102.485,88.878 ; 92.502,89.081 102.485,89.081 ; 92.502,89.284 102.485,89.284 ; 92.502,90.504 95.502,90.504 ; 92.502,90.707 95.502,90.707 ; 92.502,90.91 95.502,90.91 ; 92.502,91.113 95.502,91.113 ; 92.502,91.316 95.502,91.316 ; 93.502,88.354 94.502,88.354 ; 93.502,91.52 94.502,91.52 ; 93.502,91.723 94.502,91.723 ; 93.502,91.926 94.502,91.926 ; 93.502,92.129 94.502,92.129 ; 93.502,92.332 94.502,92.332 ; 93.502,92.536 102.485,92.536 ; 93.502,92.739 102.485,92.739 ; 93.502,92.942 102.485,92.942 ; 93.502,93.145 102.485,93.145 ; 93.502,93.348 102.485,93.348 ; 94.502,87.862 95.652,87.862 ; 94.502,88.065 95.652,88.065 ; 94.502,88.268 95.652,88.268 ; 95.652,88.395 101.951,88.421 102.485,88.421 102.485,94.364 77.085,94.364 77.085,93.354 93.502,93.354 93.502,91.354 92.502,91.354 92.502,90.354 95.502,90.354 95.502,91.354 94.502,91.354 94.502,92.354 100.502,92.354 100.502,89.488 92.502,89.488 102.485,89.488 ; 100.502,89.691 102.485,89.691 ; 100.502,89.894 102.485,89.894 ; 100.502,90.097 102.485,90.097 ; 100.502,90.3 102.485,90.3 ; 100.502,90.504 102.485,90.504 ; 100.502,90.707 102.485,90.707 ; 100.502,90.91 102.485,90.91 ; 100.502,91.113 102.485,91.113 ; 100.502,91.316 102.485,91.316 ; 100.502,91.52 102.485,91.52 ; 100.502,91.723 102.485,91.723 ; 100.502,91.926 102.485,91.926 ; 100.502,92.129 102.485,92.129 ; 100.502,92.332 102.485,92.332
  Top Layer w0.343: R11.2 C26.1@91.715,87.227
  Top Layer w0.457: C26.1@91.715,87.227 91.715,89.748 92.569,90.602
NetD2_1: D2.1 R1.2 | length 7.1
  Top Layer w0.127: R1.2@88.758,71.928 v2(88.758,72.704) ; D2.1 v2(91.311,76.674)
  Top Layer w0.14: D2.1 D2.1@90.24,76.672
  Bottom Layer w0.127: v2(88.758,72.704) 88.836,72.704 90.375,74.243 ; 90.375,74.242 90.745,74.242 91.311,74.809 v2(91.311,76.674)
NetD2_2: D2.2 R17.1 | length 2.4
  Top Layer w0.2: R17.1 86.208,76.608 86.274,76.674 D2.2
NetD2_4: D2.4 R16.1 | length 2.6
  Top Layer w0.2: R16.1 86.208,77.794 86.528,77.474 D2.4
NetL4_1: L4.1 U1.13 | length 4.9
  Top Layer w0.14: U1.13 102.336,68.635 102.426,68.544 104.32,68.544 105.216,67.648 L4.1
NetL5_1: L5.1 U1.14 | length 4.6
  Top Layer w0.14: U1.14 102.213,69.134 102.537,68.811 105.483,68.811 L5.1
NetL6_1: L6.1 U1.15 | length 5
  Top Layer w0.14: U1.15 102.091,69.635 102.648,69.078 104.323,69.078 105.069,69.824 L6.1
NetL7_1: L7.1 U1.16 | length 5.8
  Top Layer w0.14: U1.16 101.969,70.135 102.758,69.345 104.212,69.345 105.035,70.168 105.035,70.848 105.099,70.912 L7.1
NetL8_1: L8.1 U1.17 | length 6.7
  Top Layer w0.14: U1.17 101.846,70.634 102.869,69.612 104.101,69.612 104.768,70.279 104.768,71.744 105.024,72 L8.1
NetL9_1: L9.1 U1.36 | length 2.7
  Top Layer w0.2: v2(93.315,69.635) U1.36
  Bottom Layer w0.2: L9.1 92.95,69.27 v2(93.315,69.635)
NetL9_2: L9.2 R2.2 U2.5 | length 17.5
  Top Layer w0.2: U2.5 v2(101.76,78.273) 102.335,78.848 R2.2
  Bottom Layer w0.2: L9.2 92.352,73.344 93.824,74.816 97.856,74.816 101.313,78.273 v2(101.76,78.273)
NetL10_1: L10.1 U1.38 | length 6.7
  Top Layer w0.14: L10.1 90.11,70.848 90.752,70.206 90.752,69.209 91.327,68.635 U1.38
NetL10_2: L10.2 U2.6 | length 19.4
  Top Layer w0.2: v2(87.872,70.848) L10.2 ; U2.6 v2(101.301,78.923)
  Bottom Layer w0.2: v2(87.872,70.848) 89.218,70.848 91.281,72.911 91.281,73.222 91.681,73.622 91.894,73.622 93.598,75.327 93.598,75.592 93.974,75.968 96.952,75.968 97.169,76.186 97.826,76.186 98.043,75.968 98.496,75.968 v2@101.429,78.901 ; v2@101.301,78.901 v2(101.301,78.923)
NetL11_1: L11.1 U1.30 | length 3.6
  Top Layer w0.2: L11.1 93.29,73.238 93.543,72.985 U1.30
NetL11_2: L11.2 R5.2 | length 1.1
  Top Layer w0.2: L11.2 92.31,75.35 R5.2
NetL12_1: L12.1 P1.7 | length 18.2
  Top Layer w0.2: L12.1 v2(102.25,65.706)
  Bottom Layer w0.2: P1.7 98.112,60.017 98.752,59.377 98.752,56.32 98.816,56.256 99.968,56.256 100.232,56.52 100.232,62.216 102.25,64.234 v2(102.25,65.706)
NetL12_2: L12.2 U1.11 | length 2.9
  Top Layer w0.2: U1.11 101.11,64.992 L12.2
NetL13_1: L13.1 U2.11 | length 1.4
  Top Layer w0.203: U2.11 97.857,81.31 L13.1
NetP1_5: P1.5 SW1.B U1.3 | length 23.9
  Top Layer w0.2: v2(96.759,65.097) U1.3
  Bottom Layer w0.2: v2(96.759,65.097) 96.759,61.875 P1.5 96.842,60.278 97.472,59.648 97.472,56.192 97.735,55.929 100.103,55.929 100.11,55.936 101.301,55.936 101.721,55.516 101.721,56.619 102.284,57.183 106.913,57.183 107.521,56.575 SW1.B@107.521,55.516
NetP1_6: P1.6 U1.4 | length 10
  Top Layer w0.2: v2(97.259,65.749) U1.4
  Bottom Layer w0.2: P1.6 96.842,59.766 96.192,60.416 96.192,65.211 96.73,65.749 v2(97.259,65.749)
NetP1_8: P1.8 U1.5 | length 9.4
  Top Layer w0.2: U1.5 97.759,65.056 v2@97.791,65.088
  Bottom Layer w0.2: v2(97.792,65.088) 97.792,63.418 97.51,63.136 97.51,63.078 97.498,63.066 97.498,60.124 98.112,59.51 P1.8
NetP1_10: P1.10 U1.6 | length 9.5
  Top Layer w0.2: v2(98.259,65.725) U1.6
  Bottom Layer w0.2: v2(98.259,65.725) 98.259,65.389 98.432,65.216 98.432,63.424 98.737,63.119 98.737,59.915 99.382,59.269 P1.10
NetP2_1_7: P2_1.7 TRANS1.SIG | length 63.6
  POWER w0.2: TRANS1.SIG 87.631,67.946 82.901,67.946 81.92,66.965 81.92,59.275 82.891,58.304 96.453,58.304 96.989,57.768 108.485,57.768 112.32,61.602 112.32,69.709 112.786,70.175 112.786,74.813 P2_1.7
NetP2_2_3: P2_2.3 TRANS1.3 | length 36.2
  POWER w0.2: TRANS1.3 90.298,60.017 108.961,60.017 109.417,60.473 109.417,68.198 109.952,68.734 109.952,74.519 P2_2.3
NetP2_2_4: P2_2.4 TRANS1.2 | length 52.8
  POWER w0.2: TRANS1.2 84.05,62.188 87.55,58.688 91.069,58.688 92.029,59.648 109.199,59.648 109.776,60.225 109.776,68.095 110.319,68.638 110.319,74.243 111.108,75.032 112.14,75.032 112.761,75.654 112.761,77.575 111.741,78.595 111.488,78.595 P2_2.4
NetP2_12: P2.12 R1.1 U1.34 | length 20.6
  Top Layer w0.14: P2.12 77.147,72.713 79.132,72.713 79.575,73.156 88.946,73.156 89.668,72.434 R1.1 90.88,71.936 92.032,70.784 93.44,70.784 93.59,70.634 U1.34
NetP2_16: P2.16 Q2.1 | length 7.3
  Top Layer w0.2: P2.16 76.78,78.74 78.128,77.392 80.069,77.392 81.247,76.214 Q2.1
NetP2_18: P2.18 Q1.1 | length 6.8
  Top Layer w0.2: P2.18 77.432,80.048 81.072,80.048 81.26,80.236 Q1.1
NetQ1_3: Q1.3 R16.2 | length 1.5
  Top Layer w0.2: Q1.3 86.154,79.286 R16.2
NetQ2_3: Q2.3 R17.2 | length 1.5
  Top Layer w0.2: Q2.3 86.206,75.264 R17.2
NetR3_1: R3.1 R4.2 R6.2 | length 2
  Top Layer w0.14: R6.2 R4.2
NetR4_1: R4.1 U1.19 | length 11
  Top Layer w0.2: U1.19 v2(102.126,71.634) ; v2(109.312,69.824) 109.312,67.854 R4.1
  Bottom Layer w0.2: v2(102.126,71.634) 107.501,71.634 v2(109.312,69.824)
NetR9_1: R9.1 U2.7 | length 2.9
  Top Layer w0.2: U2.7 101.973,79.573 102.272,79.872 R9.1
NetR10_2: R10.2 U2.15 | length 5.1
  Top Layer w0.2: R10.2@92.466,77.361 92.466,78.667 92.722,78.923 U2.15
RF_N: U1.25 U2.2 | length 4.5
  Top Layer w0.127: U2.2 97.845,76.534 98.37,76.01 98.37,73.658 98.259,73.548 U1.25
RF_P: U1.24 U2.4 | length 4.5
  Top Layer w0.127: U1.24 98.759,73.548 98.649,73.658 98.649,76.039 99.145,76.534 U2.4
USB2_N: P2_1.3 R13.1 | length 7.7
  Top Layer w0.216: R13.1 108.908,62.696 110.179,62.696 110.325,62.55 110.731,62.55 111.232,63.051 v2(111.232,63.104)
  Bottom Layer w0.216: v2(111.232,63.104) 111.232,63.817 112.375,64.96 113.28,64.96 114.173,65.853 114.173,65.877 P2_1.3
USB2_P: P2_1.2 R12.1 | length 8.2
  Top Layer w0.216: R12.1 108.908,63.064 110.394,63.064 110.418,63.04 110.465,63.087 v2(110.465,63.104)
  Bottom Layer w0.216: v2(110.465,63.104) 111.041,62.528 111.36,62.528 111.722,62.89 111.722,63.307 111.6,63.429 111.6,63.664 112.528,64.592 113.328,64.592 P2_1.2@114.173,63.747 ; P2_1.2 P2_1.2@114.173,63.747 ; P2_1.2@114.173,63.851 P2_1.2@114.173,63.747
USB3_N: P2_1.5 R15.1 | length 13.9
  Top Layer w0.216: R15.1 v2(108.608,61.504)
  Bottom Layer w0.216: 108.242,66.395 108.242,64.583 108.12,64.461 108.12,64.055 108.608,63.567 v2(108.608,61.504) ; 108.242,66.459 111.655,69.872 112.925,69.872 P2_1.5
USB3_P: P2_1.4 R14.1 | length 10.2
  Top Layer w0.216: R14.1 v2(108.61,64.258)
  Bottom Layer w0.216: v2(108.61,64.258) 108.61,66.242 ; 108.61,66.306 111.808,69.504 112.896,69.504 113.82,68.58 P2_1.4
USB_N: R7.1 U1.1 | length 12
  Top Layer w0.216: U1.1 95.759,66.177 95.825,66.111 95.825,63.412 96.501,62.736 103.311,62.736 103.615,62.432 R7.1
USB_P: R8.1 U1.2 | length 11.3
  Top Layer w0.216: U1.2 96.259,66.177 96.194,66.111 96.194,63.614 96.704,63.104 103.329,63.104 103.617,63.392 R8.1
USBPI_N: C15.2 R7.2 R13.2 R15.2 | length 3.4
  Top Layer w0.216: R7.2 105.194,62.728 105.592,62.728 C15.2 106.376,62.728 107.384,62.728 R13.2
USBPI_P: C16.2 R6.1 R8.2 R12.2 R14.2 | length 9.9
  Top Layer w0.216: R14.2 107.45,63.096 106.376,63.096 C16.2 105.592,63.096 105.196,63.096 R8.2 104.9,65.177 105.467,65.744 R6.1
VDD: C1.2 C4.2 C5.2 C6.2 C7.2 C8.2 C9.2 L1.2 U1.20 U1.23 U1.26 U1.27 U1.28 U1.31 U1.40 | length 17.6
  Top Layer w0.2: v2(91.536,72.368) C7.2 ; C7.2@92.352,72.176 92.393,72.135 U1.31 ; C9.2 v2(95.04,65.472) ; 94.4,65.792 94.4,66.56 94.909,67.069 U1.40 ; C5.2@96.384,75.565 96.384,74.176 96.759,73.801 U1.28 ; C5.2 v2(96.384,76.48) ; U1.27 97.259,73.728 ; U1.26 97.759,73.717 ; U1.23 99.259,73.532 100.232,74.504 C4.2 v2(100.232,75.832) ; U1.20 103.359,72.135 C8.2 103.551,72.327 v2(104.254,72.327)
  other v2: 90.56,73.749 90.56,74.688
VDD_CC2590: C3.2 C22.2 C23.2 C24.2 C25.2 L3.2 R9.2 U2.1 U2.10 U2.13 U2.16 | length 14.3
  Top Layer w0.127: v2@89.987,80.217 C25.2@91.927,80.217 ; C25.2@91.997,80.223 U2.13 ; U2.10 98.495,82.201 99.177,82.883 C22.2 v2(99.637,83.723) ; R9.2 v2(103.874,80.66)
  Top Layer w0.2: v2(93.302,78.272) C24.2 94.017,78.273 U2.16 ; v2(96.068,77.582) 97.18,77.582 97.195,77.567 U2.1
  other v2: 89.972,80.192 102.631,82.189 103.783,82.189
X_N: C17.2 U1.21 X_1.1 | length 6.5
  Top Layer w0.14: U1.21 100.259,73.631 100.377,73.749 101.849,73.749 102.002,73.596 102.376,73.596 102.529,73.749 103.635,73.749 103.998,74.112 103.998,74.517 X_1.1@104.085,74.517 ; X_1.1 105.198,74.88 C17.2
X_P: C18.2 U1.22 X_1.3 | length 6.5
  Top Layer w0: X_1.3@102.659,76.227 X_1.3@102.659,76.33
  Top Layer w0.14: U1.22 99.759,73.604 100.202,74.047 101.439,74.047 102.144,74.752 102.144,75.84 102.264,75.96 X_1.3@102.651,75.96 ; X_1.3 103.021,77.413 C18.2
pads on no net: P1.3 P1.4 P1.9 P2.3 P2.5 P2.7 P2.8 P2.10 P2.11 P2.13 P2.15 P2.19 P2.21 P2.22 P2_1.1 P2_1.6 P2_1.8 P2_1.9 P2_1.10 P2_1.11 P2_2.1 P2_2.2 P2_2.5 P2_2.6 P2_2.7 TRANS1.1 TRANS1.5 U1.29 U2.3
copper on no net:
  other v3: 104.621,55.716 104.621,58.716 104.621,58.716
  other v5: 86.9,56.815 86.9,61.315
  other v6: 77.503,57.183 112.903,57.183

## Polygon pours and split planes (outlines as drawn)
GND on Top Layer "GND" (solid, remove dead copper, pour order 66): 75.881,94.238 75.881,55.454 114.665,55.454 114.665,94.238
VDD on Top Layer "VDD" (solid, pour order 42): 96.824,73.664 97.92,73.664 97.92,73.92 96.824,74.76 96.824,75.969 96.04,75.969 96.04,73.664
IOVDD on Top Layer "VDD" (solid, pour order 44): 92.271,62.624 93.76,62.624 93.76,64.384 92.271,64.384
VDD on Top Layer "VDD" (solid, pour order 38): 89.408,75.073 89.408,73.344 90.944,73.344 90.944,75.073
VDD_CC2590 on Top Layer "VDD" (solid, pour order 30): 104.167,83.405 102.247,83.405 102.247,81.805 104.167,81.805
3V3 on POWER "POWER-3V3" (solid, remove dead copper, pour order 62): 77.779,87.456 77.779,56.815 113.179,56.815 113.179,87.456
VDD_CC2590 on POWER "POWER-VDD_CC2590" (solid, pour order 52): 88.192,84.16 104.896,84.16 104.896,77.056 88.192,77.056
VDD on POWER "POWER-VDD" (solid, pour order 48): 89.92,75.136 94.976,75.136 94.976,76.848 95.056,76.928 103.36,76.928 105.408,76.928 105.433,71.552 103.36,71.552 103.36,64.64 93.12,64.64 93.12,71.68 89.92,71.68
no net on POWER "POWER-No Net" (solid, pour order 56): 77.056,92.992
no net on POWER "POWER-No Net 1" (solid, pour order 54): 79.04,94.4
no net on POWER "POWER-No Net 2" (solid, pour order 50): 88.256,84.096
IOVDD on POWER "POWER-IOVDD" (solid, pour order 46): 90.944,69.696 92.8,69.696 92.8,64.448 103.68,64.448 103.68,71.521 105.216,71.521 105.216,62.592 90.944,62.592
GND on GND "GND" (solid, pour order 22): 75.776,87.456 75.776,55.488 114.56,55.488 114.56,87.456
GND on Bottom Layer "GND" (solid, remove dead copper, pour order 64): 75.776,87.456 75.776,55.488 114.56,55.488 114.56,87.456

## Other copper
Top Layer:
  pour cut-out: 92.627,74.868 92.996,74.868 92.942,74.814 92.942,73.857 92.625,73.857 92.621,73.853
  pour cut-out: 97.009,65.389 97.016,65.396 97.48,65.396 97.48,64.917 97.693,64.704 97.678,64.69 96.704,64.69
  pour cut-out: 100.517,64.992 100.941,64.992 100.902,64.953 100.902,64.388 100.549,64.388 100.541,64.395
  pour cut-out: 108.973,67.575 108.97,66.988 109.513,66.988 109.732,67.207 109.732,67.592
  pour cut-out: 86.9,86.131 85.57,86.131 85.56,86.122 85.56,85.41 86.679,84.292 87.142,84.755 87.168,84.755
  pour cut-out: 86.891,86.131
  pour cut-out: 92.398,87.516 92.398,83.2 94.261,83.2 96.38,84.426 98.56,84.426 98.56,81.6 97.146,81.6 97.156,83.045 96.698,83.045 94.551,81.805 91.65,81.805 91.008,82.447 91.008,84.755 86.89,84.755 86.891,86.131 91.008,86.131 91.008,87.516
  pour cut-out: 94.656,84.907
  pour cut-out: 73.349,87.452 73.35,95.168 115.334,95.168 115.333,87.452
  pour cut-out: 86.679,84.292 85.56,86.122 83.428,84.928 84.511,83.103
  pour cut-out: 97.857,75.688 97.857,72.256 99.132,72.256 99.132,75.748 99.487,76.238 99.542,76.667 99.542,77.863 97.487,77.863 97.487,76.433
  pour cut-out: 94.78,73.164 94.78,66.674 94.79,66.684 101.184,66.684 101.184,73.04 101.285,73.14
  pour cut-out: 96.092,81.298 96.084,79.899 95.444,79.899 95.446,79.286 96.092,79.286 96.12,77.192 99.852,77.192 101.022,79.94 101.022,80.628 99.587,80.628 99.587,82.06 98.902,82.06 98.902,81.292 97.195,81.298 97.195,82.06 96.882,82.06 96.882,81.292

## Silkscreen, mask and mechanical layers (free items; w line width, h text height)
Mechanical 1:
  lines w0.254: 112.779,94.869 77.597,94.869 ccw(c77.534,92.519) 75.184,92.459 75.184,57.277 ccw(c77.534,57.213) 77.594,54.864 112.776,54.864 ccw(c112.84,57.213) 115.189,57.274 115.189,92.456 ccw(c112.84,92.519) 112.779,94.869 ; 77.503,57.183 112.903,57.183 112.903,92.583 77.503,92.583 77.503,57.183

## Text inside footprints (layer, text, board x,y; h text height)
P2: Top Overlay "22" at 76.708,87.884 h1.27 r90; Top Overlay "21" at 79.248,87.884 h1.27 r90; Top Overlay "2" at 76.708,58.42 h1.27 r90; Top Overlay "1" at 79.248,58.42 h1.27 r90